# Altium PCB board.PcbDoc
Units mil, origin at the board's own origin, x right, y up, seen from the top; angles counter-clockwise.
Board outline 6000 x 4000 mil, 2 copper layers (Top Layer, Bottom Layer); 87 components, 53 nets, 353 pads, 0 vias.
Unrouted connection lines stored in the file: 208.
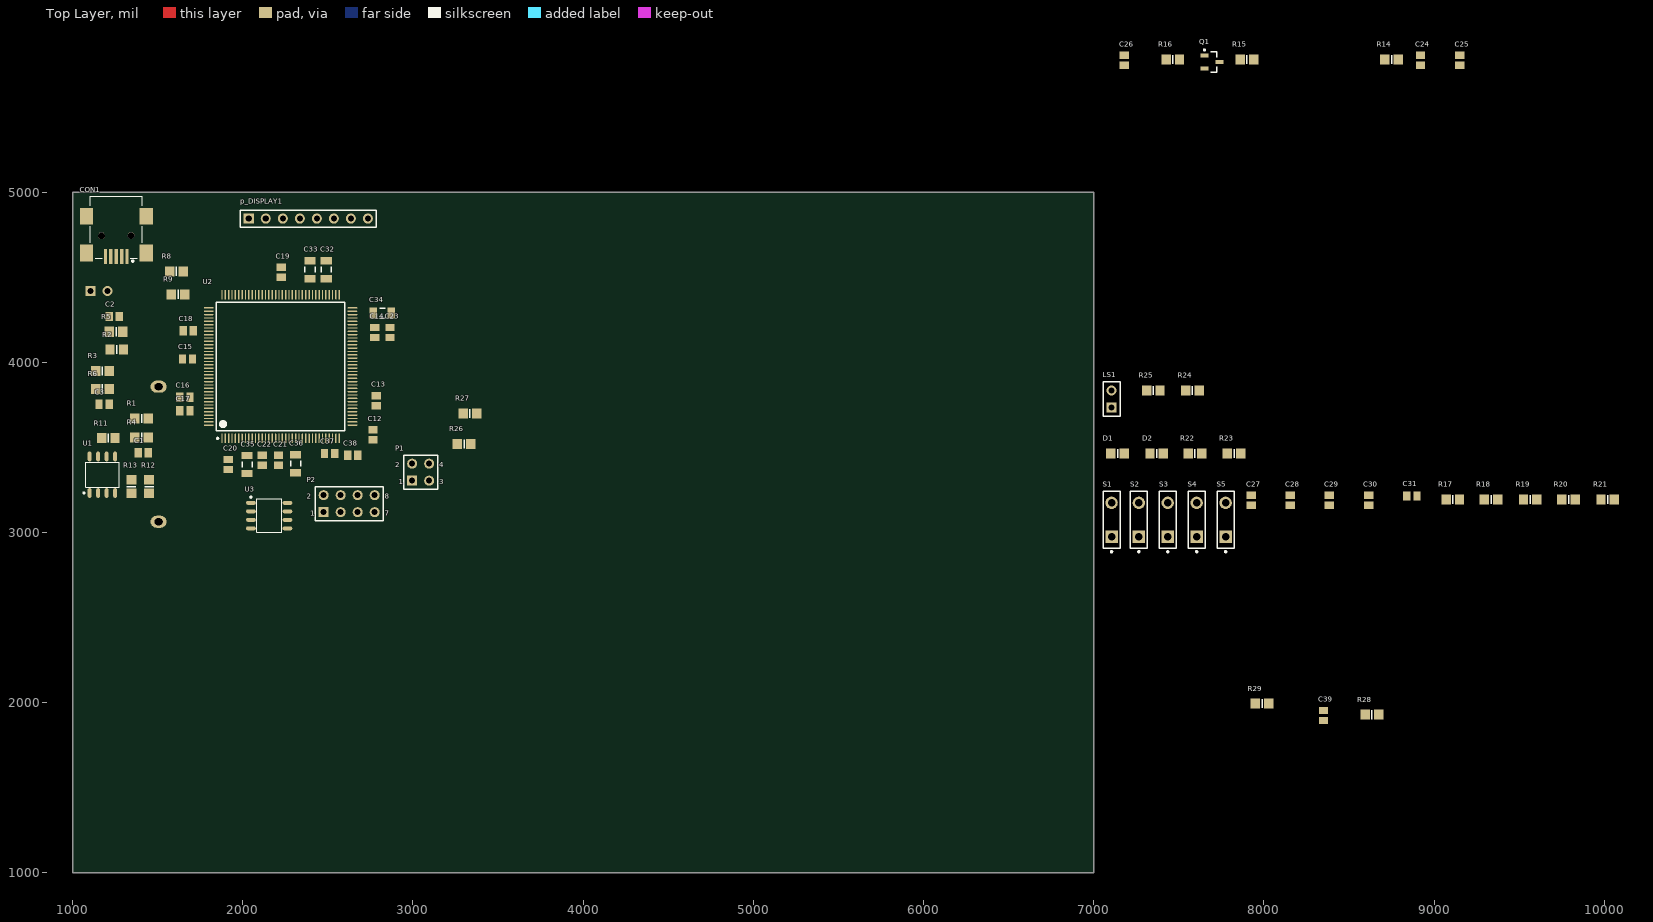
[diagram p0: Top Layer view]
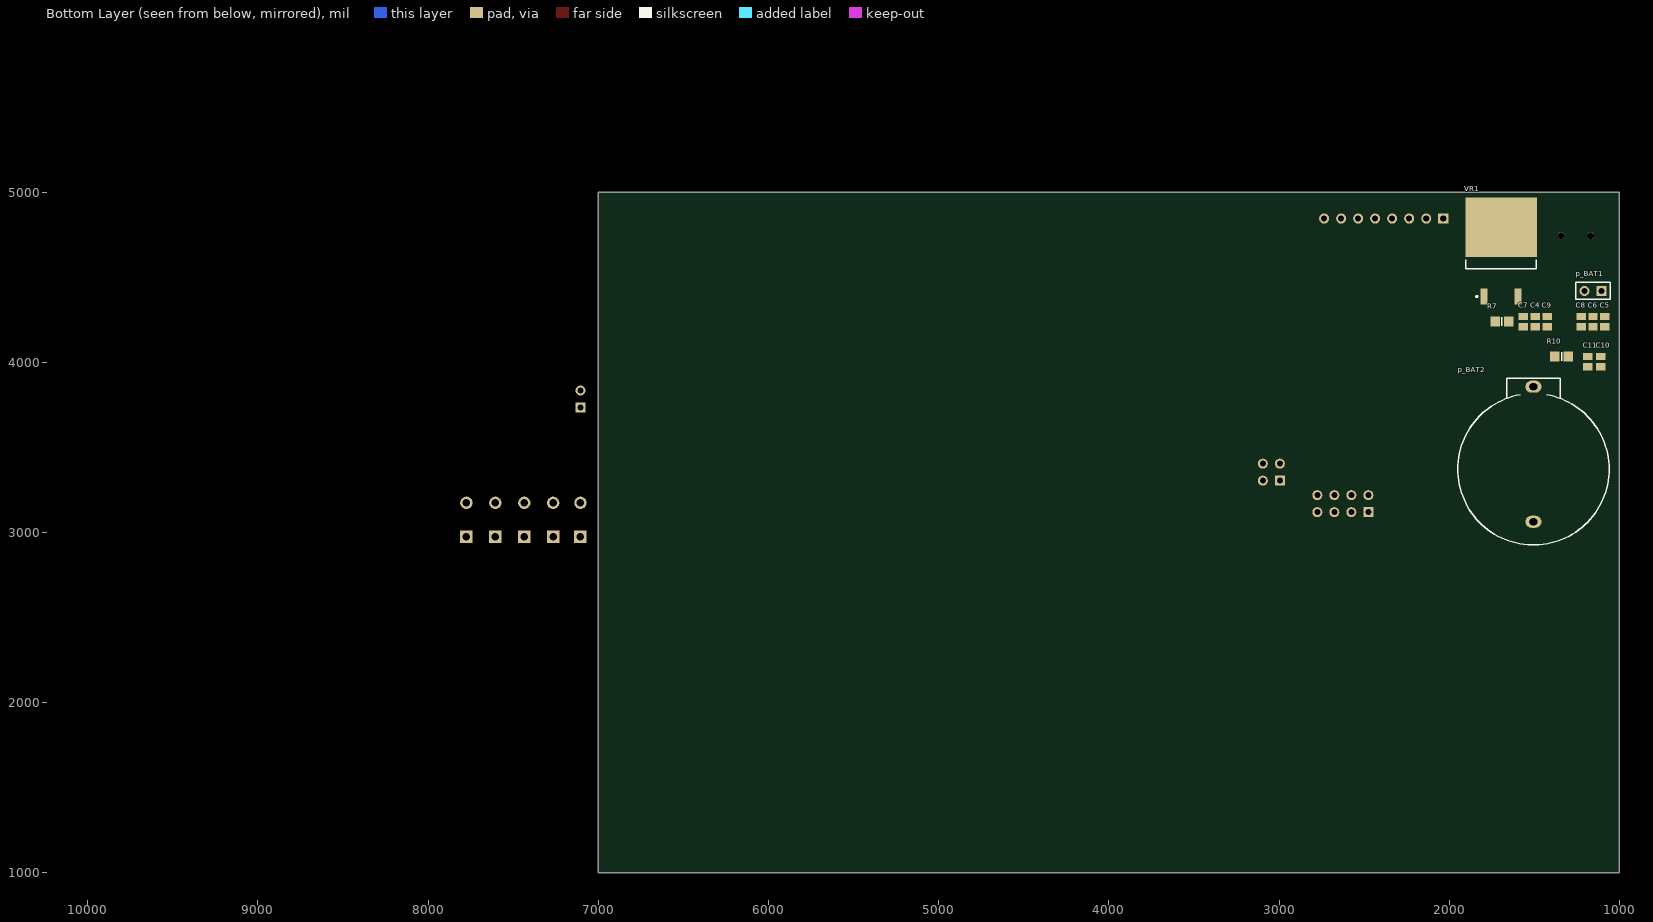
[diagram p1: Bottom Layer view, seen from below]

## Layer stack, top to bottom
Top Solder: solder mask 0.4, Solder Resist, Dk 3.5
Top Layer: signal copper 1.4
Dielectric 1: dielectric 12.6, FR-4, Dk 4.8
Bottom Layer: signal copper 1.4
Bottom Solder: solder mask 0.4, Solder Resist, Dk 3.5

## Board outline
1000,1000 7000,1000 7000,5000 1000,5000

## Design rules (kind name [scope] priority, off if disabled: settings)
Clearance [All] p1: gap=10 ignorepadtopadclearanceinfootprint=FALSE except(0: Arc-Hole Track-Hole SMDPad-Hole THPad-Hole Via-Hole Fill-Hole Poly-Hole Region-Hole Text-Hole)
PolygonConnect [All] p1: connectstyle=Relief reliefconductorwidth=10 reliefentries=4 polygonreliefangle="90 Angle" airgapwidth=10
RoomDefinition p06_sound [InComponentClass('p06_sound')] p1: confinementstyle=ConfineIn formatcopy=TRUE lockcomponents=FALSE outline 7045,3675 7680,3675 7680,3995 7045,3995
RoomDefinition p05_leds [InComponentClass('p05_leds')] p2: confinementstyle=ConfineIn formatcopy=TRUE lockcomponents=FALSE outline 7045,3405 7925,3405 7925,3625 7045,3625
RoomDefinition p04_buttons [InComponentClass('p04_buttons')] p3: confinementstyle=ConfineIn formatcopy=TRUE lockcomponents=FALSE outline 7045,2870 10115,2870 10115,3355 7045,3355
RoomDefinition p03_display [InComponentClass('p03_display')] p4: confinementstyle=ConfineIn formatcopy=TRUE lockcomponents=FALSE outline 7140,5000 9305,5000 9305,5940 7140,5940
RoutingVias [All] p1: holewidth=28 width=50 viastyle="Through Hole" minholewidth=28 minwidth=50 maxholewidth=28 maxwidth=50
SolderMaskExpansion [All] p1: expansion=4
Width [All] p1: maxlimit=10 minlimit=10 preferedwidth=10
30 further rules are at their usual default settings.

## Classes and differential pairs
component class p09_memory: U3
component class p02_power: C1 C2 C3 C4 C5 C6 C7 C8 C9 C10 C11 C12 C13 C14 C15 C16 C17 C18 C19 C20 C21 C22 C23 C39 CON1 p_BAT1 p_BAT2 R1 R2 R3 R4 R5 R6 R7 R8 R9 R10 R11 R12 R13 R28 R29 U1 VR1
component class p04_buttons: C27 C28 C29 C30 C31 R17 R18 R19 R20 R21 S1 S2 S3 S4 S5
component class p05_leds: D1 D2 R22 R23
component class p06_sound: LS1 R24 R25
component class p07_cpu_renesas_144: C32 C33 C34 C35 C36 C37 C38 U2
component class p08_boot: P1 P2 R26 R27
component class p03_display: C24 C25 C26 p_DISPLAY1 Q1 R14 R15 R16

## Components (designator, comment, footprint, x,y, rotation, side; value= is the part's Value field where it differs from the comment)
C1 "Cap" C0805 1415,3470 r180 top value=0.1nF
C2 "Cap" C0805 1245,4270 r180 top value=0.1nF
C3 "Cap" C0805 1185,3755 r180 top value=0.1nF
C4 "Cap" C0805 1495,4240 r90 bottom value=100nF
C5 "Cap" C0805 1085,4240 r90 bottom value=100nF
C6 "Cap" C0805 1155,4240 r90 bottom value=100nF
C7 "Cap" C0805 1565,4240 r90 bottom value=100nF
C8 "Cap" C0805 1225,4240 r90 bottom value=100nF
C9 "Cap" C0805 1425,4240 r90 bottom value=100nF
C10 "Cap" C0805 1110,4005 r90 bottom value=1nF
C11 "Cap" C0805 1185,4005 r90 bottom value=100nF
C12 "Cap" C0805 2765,3575.47 r90 top value=100nF
C13 "Cap" C0805 2785,3775.47 r90 top value=100nF
C14 "Cap" C0805 2775,4175.47 r90 top value=100nF
C15 "Cap" C0805 1675,4020 r0 top value=100nF
C16 "Cap" C0805 1660,3795 r0 top value=100nF
C17 "Cap" C0805 1660,3715 r0 top value=100nF
C18 "Cap" C0805 1679.53,4185 r0 top value=100nF
C19 "Cap" C0805 2225,4530 r270 top value=100nF
C20 "Cap" C0805 1915,3400 r90 top value=100nF
C21 "Cap" C0805 2210,3425 r90 top value=100nF
C22 "Cap" C0805 2115,3425.47 r90 top value=100nF
C23 "Cap" C0805 2865,4175.47 r90 top value=100nF
C24 "Cap" C0805 8920,5775 r90 top value=1nF
C25 "Cap" C0805 9150,5775 r90 top value=10nF
C26 "Cap" C0805 7180,5775 r90 top value=1nF
C27 "Cap" C0805 7925,3190 r90 top value=0.1nF
C28 "Cap" C0805 8155,3190 r90 top value=0.1nF
C29 "Cap" C0805 8385,3190 r90 top value=0.1nF
C30 "Cap" C0805 8615,3190 r90 top value=0.1nF
C31 "Cap" C0805 8870,3215 r0 top value=0.1nF
C32 "Cap" C1206 2490,4545 r90 top value=10uF
C33 "Cap" C1206 2395,4545 r90 top value=4.7uF
C34 "Cap" C1206 2820,4290 r180 top value=10uF
C35 "Cap" C1206 2025,3400 r270 top value=4.7uF
C36 "Cap" C1206 2310,3405 r270 top value=4.7uF
C37 "Cap" C0805 2510,3465 r180 top value=1uF
C38 "Cap" C0805 2645.47,3455 r180 top value=1uF
C39 "Cap" C0805 8350,1925 r90 top value=0.1nF
CON1 "897-43-005-00-100001" USB-MINI-B-5P-SMD 1256.61,4622.95 r180 top
D1 "LED0" 6-0805_M 7140,3465 r0 top
D2 "LED0" 6-0805_M 7370,3465 r0 top
LS1 "Buzzer" HDR1X2 7105,3735 r90 top
P1 "Header 2X2" HDR2X2 2995,3305 r0 top
P2 "Header 4X2" HDR2X4 2475,3120 r0 top
p_BAT1 "Header 2" HDR1X2 1105,4420 r0 bottom
p_BAT2 "" BTH2032 1505,3370 r270 bottom
p_DISPLAY1 "Nokia 5110 Display" HDR1X8 2035,4845 r0 top
Q1 "PNP" SOT-23B_N 7695,5765 r0 top
R1 "Res1" 6-0805_M 1405,3670 r180 top value=120k
R2 "Res1" 6-0805_M 1259.37,4075 r0 top value=120k
R3 "Res1" 6-0805_M 1175.63,3950 r180 top value=120k
R4 "Res1" 6-0805_M 1405,3560 r180 top value=33k
R5 "Res1" 6-0805_M 1255,4180 r180 top value=33k
R6 "Res1" 6-0805_M 1175,3845 r180 top value=33k
R7 "0R" 6-0805_M 1690,4240 r0 bottom value=0.2R
R8 "0R" 6-0805_M 1610,4535 r0 top value=0.2R
R9 "0R" 6-0805_M 1619.37,4400 r0 top value=0.2R
R10 "Res1" 6-0805_M 1340,4035 r0 bottom value=0.2R
R11 "Res1" 6-0805_M 1210,3555 r180 top value=120k
R12 "Res1" 6-0805_M 1450,3270 r270 top value=120k
R13 "Res1" 6-0805_M 1345,3270 r90 top value=120k
R14 "Res1" 6-0805_M 8750,5780 r0 top value=100k
R15 "Res1" 6-0805_M 7900,5780 r0 top value=10k
R16 "Res1" 6-0805_M 7465,5780 r0 top value=300R
R17 "Res1" 6-0805_M 9110,3195 r0 top value=100k
R18 "Res1" 6-0805_M 9335,3195 r0 top value=100k
R19 "Res1" 6-0805_M 9565,3195 r0 top value=100k
R20 "Res1" 6-0805_M 9790,3195 r0 top value=100k
R21 "Res1" 6-0805_M 10020,3195 r0 top value=100k
R22 "Res1" 6-0805_M 7595,3465 r0 top value=10k
R23 "Res1" 6-0805_M 7825,3465 r0 top value=10k
R24 "Res1" 6-0805_M 7580,3835 r0 top value=0R
R25 "Res1" 6-0805_M 7350,3835 r0 top value=10R
R26 "Res1" 6-0805_M 3300,3520 r0 top value=120k
R27 "Res1" 6-0805_M 3335,3700 r0 top value=120k
R28 "0R" 6-0805_M 8635,1930 r0 top value=0.2R
R29 "0R" 6-0805_M 7989.37,1995 r0 top value=0.2R
S1 "SW-PB" SPST-2 7105,3075 r90 top
S2 "SW-PB" SPST-2 7265,3075 r90 top
S3 "SW-PB" SPST-2 7435,3075 r90 top
S4 "SW-PB" SPST-2 7605,3075 r90 top
S5 "SW-PB" SPST-2 7775,3075 r90 top
U1 "TPS2116" SOIC127P600X175-8N 1175,3340 r90 top
U2 "R7F0E015D2CFB#AA1" SQFP50P2200X2200X170-144N 2222.24,3975.79 r90 top
U3 "W25Q80DV/DL" SOIC127P600X175-8N 2155,3100 r0 top
VR1 "Volt Reg" D2PAK_N 1695,4655.24 r90 bottom

## Footprints (in the part's own frame and the unit in brackets; to place one, negate y for a bottom-side part, rotate by r counter-clockwise, add the part's x,y. Pads: shape width x height; smd on the part's side, far side on the other; paste and mask are expansions set on the pad)
6-0805_M [mm] "Chip Resistor, Body 2.0x1.2mm, IPC Low Density"
  rect 1.4x1.5 smd: 1(-1,0) 2(1,0)
  silkscreen extent 0,-0.65 0,0.65, body extent -1.07,-0.7 1.07,0.7, height 0.7
BTH2032 [mm] "CR2032 BATTERY HOLDER"
  oval 1.8x2.4 hole 1 slot 1.2 at 90 deg: 1(-12.38,0) 2(7.78,0)
  silkscreen extent -13.6,-11.3 11.25,11.3, body extent -13.45,-11 11.05,11, height 8.5
C0805 [mm] "Chip Capacitor, Body 2.0x1.3mm, IPC High Density"
  rect 1.1x1.4 smd: 1(-0.75,0) 2(0.75,0)
  body extent -1.1,-0.72 1.1,0.72, height 1.4
C1206 [mm] "Chip Capacitor, Body 3.2x1.6mm, IPC High Density"
  rect 1.1x1.7 smd: 1(-1.35,0) 2(1.35,0)
  silkscreen extent -0.4,-0.75 0.4,0.75, body extent -1.7,-0.9 1.7,0.9, height 1.3
D2PAK_N [mm] "D2-PAK, 4-Leads, Body 8.8x10.4mm, Pitch 2.54mm, Lead Span 15.1mm, IPC Medium Density"
  rect 2.4x1.05 smd: 1(-6.8,2.54) 3(-6.8,-2.54)
  rect 8.9x10.65 smd: 2(3.55,0)
  silkscreen extent -6.92,-5.25 -1.3,5.25, body extent -2.7,-5.28 6.3,5.28, height 4.69
HDR1X2 [mm] "Connector; Header; 2 Position"
  rect 1.5x1.5 hole 0.9: 1(0,0)
  round 1.5 hole 0.9: 2(2.54,0)
  silkscreen extent -1.27,-1.27 3.81,1.27
HDR1X8 [mm] "Connector; Header; 8 Position"
  rect 1.5x1.5 hole 0.9: 1(0,0)
  round 1.5 hole 0.9: 2(2.54,0) 3(5.08,0) 4(7.62,0) 5(10.16,0) 6(12.7,0) 7(15.24,0) 8(17.78,0)
  silkscreen extent -1.27,-1.27 19.05,1.27
HDR2X2 [mm] "Connector; Header; 2x2 Position"
  rect 1.5x1.5 hole 0.9: 1(0,0)
  round 1.5 hole 0.9: 2(0,2.54) 3(2.54,0) 4(2.54,2.54)
  silkscreen extent -1.27,-1.27 3.81,3.81
HDR2X4 [mm] "Connector; Header; 4x2 Position"
  rect 1.5x1.5 hole 0.9: 1(0,0)
  round 1.5 hole 0.9: 2(0,2.54) 3(2.54,0) 4(2.54,2.54) 5(5.08,0) 6(5.08,2.54) 7(7.62,0) 8(7.62,2.54)
  silkscreen extent -1.27,-1.27 8.89,3.81
SOIC127P600X175-8N [mm] "SOIC, 8-Leads, Body 4.90x3.90mm, Pitch 1.27mm, IPC Medium Density"
  oval 1.45x0.6 smd mask+0.1: 1(-2.725,1.905) 2(-2.725,0.635) 3(-2.725,-0.635) 4(-2.725,-1.905) 5(2.725,-1.905) 6(2.725,-0.635) 7(2.725,0.635) 8(2.725,1.905)
  silkscreen extent -2.85,-2.5 1.85,2.88, body extent -3,-2.5 3,2.5, height 1.75
SOT-23B_N [mm] "SOT23, 3-Leads, Body 2.9x1.3mm, Pitch 0.95mm, Lead Span 2.4mm, IPC Medium Density"
  rect 1.15x0.6 smd: 1(-1.125,0.95) 2(-1.125,-0.95) 3(1.125,0)
  silkscreen extent -1.25,-1.5 0.7,1.92, body extent -0.7,-1.5 0.7,1.5, height 1.14
SPST-2 [mm] "Switch; 2 Leads"
  rect 1.85x1.85 hole 1.1: 1(-2.54,0)
  round 1.85 hole 1.1: 2(2.54,0)
  silkscreen extent -4.89,-1.27 4.28,1.27
SQFP50P2200X2200X170-144N [mm] "SQFP, 144-Leads, Body 20.00x20.00mm, Pitch 0.50mm, IPC Medium Density"
  oval 1.45x0.2 smd: 1(-10.725,8.75) 2(-10.725,8.25) 3(-10.725,7.75) 4(-10.725,7.25) 5(-10.725,6.75) 6(-10.725,6.25) 7(-10.725,5.75) 8(-10.725,5.25) 9(-10.725,4.75) 10(-10.725,4.25) 11(-10.725,3.75) 12(-10.725,3.25) 13(-10.725,2.75) 14(-10.725,2.25) 15(-10.725,1.75) 16(-10.725,1.25) 17(-10.725,0.75) 18(-10.725,0.25) 19(-10.725,-0.25) 20(-10.725,-0.75) 21(-10.725,-1.25) 22(-10.725,-1.75) 23(-10.725,-2.25) 24(-10.725,-2.75) 25(-10.725,-3.25) 26(-10.725,-3.75) 27(-10.725,-4.25) 28(-10.725,-4.75) 29(-10.725,-5.25) 30(-10.725,-5.75) 31(-10.725,-6.25) 32(-10.725,-6.75) 33(-10.725,-7.25) 34(-10.725,-7.75) 35(-10.725,-8.25) 36(-10.725,-8.75) 73(10.725,-8.75) 74(10.725,-8.25) 75(10.725,-7.75) 76(10.725,-7.25) 77(10.725,-6.75) 78(10.725,-6.25) 79(10.725,-5.75) 80(10.725,-5.25) 81(10.725,-4.75) 82(10.725,-4.25) 83(10.725,-3.75) 84(10.725,-3.25) 85(10.725,-2.75) 86(10.725,-2.25) 87(10.725,-1.75) 88(10.725,-1.25) 89(10.725,-0.75) 90(10.725,-0.25) 91(10.725,0.25) 92(10.725,0.75) 93(10.725,1.25) 94(10.725,1.75) 95(10.725,2.25) 96(10.725,2.75) 97(10.725,3.25) 98(10.725,3.75) 99(10.725,4.25) 100(10.725,4.75) 101(10.725,5.25) 102(10.725,5.75) 103(10.725,6.25) 104(10.725,6.75) 105(10.725,7.25) 106(10.725,7.75) 107(10.725,8.25) 108(10.725,8.75)
  oval 0.2x1.45 smd: 37(-8.75,-10.725) 38(-8.25,-10.725) 39(-7.75,-10.725) 40(-7.25,-10.725) 41(-6.75,-10.725) 42(-6.25,-10.725) 43(-5.75,-10.725) 44(-5.25,-10.725) 45(-4.75,-10.725) 46(-4.25,-10.725) 47(-3.75,-10.725) 48(-3.25,-10.725) 49(-2.75,-10.725) 50(-2.25,-10.725) 51(-1.75,-10.725) 52(-1.25,-10.725) 53(-0.75,-10.725) 54(-0.25,-10.725) 55(0.25,-10.725) 56(0.75,-10.725) 57(1.25,-10.725) 58(1.75,-10.725) 59(2.25,-10.725) 60(2.75,-10.725) 61(3.25,-10.725) 62(3.75,-10.725) 63(4.25,-10.725) 64(4.75,-10.725) 65(5.25,-10.725) 66(5.75,-10.725) 67(6.25,-10.725) 68(6.75,-10.725) 69(7.25,-10.725) 70(7.75,-10.725) 71(8.25,-10.725) 72(8.75,-10.725) 109(8.75,10.725) 110(8.25,10.725) 111(7.75,10.725) 112(7.25,10.725) 113(6.75,10.725) 114(6.25,10.725) 115(5.75,10.725) 116(5.25,10.725) 117(4.75,10.725) 118(4.25,10.725) 119(3.75,10.725) 120(3.25,10.725) 121(2.75,10.725) 122(2.25,10.725) 123(1.75,10.725) 124(1.25,10.725) 125(0.75,10.725) 126(0.25,10.725) 127(-0.25,10.725) 128(-0.75,10.725) 129(-1.25,10.725) 130(-1.75,10.725) 131(-2.25,10.725) 132(-2.75,10.725) 133(-3.25,10.725) 134(-3.75,10.725) 135(-4.25,10.725) 136(-4.75,10.725) 137(-5.25,10.725) 138(-5.75,10.725) 139(-6.25,10.725) 140(-6.75,10.725) 141(-7.25,10.725) 142(-7.75,10.725) 143(-8.25,10.725) 144(-8.75,10.725)
  silkscreen extent -10.85,-9.6 9.6,9.6, body extent -10,-10 10,10, height 1.7
USB-MINI-B-5P-SMD [mm]
  rect 0.5x2.2 smd mask+0.1: 1(-1.6,0) 2(-0.8,0) 3(0,0) 4(0.8,0) 5(1.6,0)
  rect 2x2.5 smd mask+0.1: 6(-4.45,-0.5) 7(4.45,-0.5) 8(-4.45,-6) 9(4.45,-6)
  round 1 hole 1 unplated mask+0.1: 10(-2.2,-3.1) 11(2.2,-3.1)
  silkscreen extent -3.85,-8.95 3.85,0.81, body extent -4.93,-9.01 4.97,-0.01, height 3.9

## Part data
C1 C2 C3 C4 C5 C6 C7 C8 C9 C10 C11 C12 C13 C14 C15 C16 C17 C18 C19 C20 C21 C22 C23 C24 C25 C26 C27 C28 C29 C30 C31 C32 C33 C34 C35 C36 C37 C38 C39: "Capacitor", LatestRevisionDate=17-Jul-2002, LatestRevisionNote="Re-released for DXP Platform.", PackageDescription="Radial Cap, Thru-Hole; 2 Leads; 0.3 in Pin Spacing", PackageReference=RAD-0.3, Published=8-Jun-2000, Publisher="Altium Limited"
CON1: library part MINI-USB-32005-201, "Connector,MiniUSB B port,5 position,Right Angle,Gold flash 30u,black,SMD", Manufacturer=MILL-MAX, Embest PN=1009007100067, Manufacturer Part Number=897-43-005-00-100001, Part Type="USB Connector"
D1 D2: "Typical INFRARED GaAs LED", LatestRevisionDate=08-Jul-2005, LatestRevisionNote="Mech Layer 1 removed.", PackageDescription="LED; 2 Leads", PackageReference=LED-0, Published=8-Jun-2000, Publisher="Altium Limited"
LS1: "Magnetic Transducer Buzzer", ComponentLink1Description="Manufacturer Link", ComponentLink1URL=http://www.megastar.com/linecard/buzzmode/index.php, DatasheetVersion=17-Dec-2003, LatestRevisionDate=17-Dec-2003, LatestRevisionNote="Schematic revised, PCB Footprint replaced.", PackageDescription="Magnetic Transducer Buzzer", PackageReference=ABSM-1574, Published=24-Mar-1999, Publisher="Altium Limited"
P1: "Header, 2-Pin, Dual row", LatestRevisionDate=17-Jul-2002, LatestRevisionNote="Re-released for DXP Platform.", Publisher="Altium Limited"
P2: "Header, 4-Pin, Dual row", LatestRevisionDate=17-Jul-2002, LatestRevisionNote="Re-released for DXP Platform.", Publisher="Altium Limited"
p_BAT1: "Header, 2-Pin", LatestRevisionDate=17-Jul-2002, LatestRevisionNote="Re-released for DXP Platform.", Publisher="Altium Limited"
p_BAT2: library part BATH_CR2032, "BATTERY HOLDER, CR2032", .=http://www.chila.ir, MANF_P#=-
p_DISPLAY1: library part "Header 8", "Header, 8-Pin", LatestRevisionDate=17-Jul-2002, LatestRevisionNote="Re-released for DXP Platform.", Publisher="Altium Limited"
Q1: "PNP Bipolar Transistor", LatestRevisionDate=29-May-2009, LatestRevisionNote="IPC-7351 Footprint Added.", PackageDescription="3-Pin SOT-23 Package 0.95 mm Pitch, 2.4 mm Lead Span", PackageReference=SOT-23B, PackageVersion=Aug-1999, Published=8-Jun-2000, Publisher="Altium Limited"
R1 R2 R3 R4 R5 R6 R10 R11 R12 R13 R14 R15 R16 R17 R18 R19 R20 R21 R22 R23 R24 R25 R26 R27: "Resistor", LatestRevisionDate=17-Jul-2002, LatestRevisionNote="Re-released for DXP Platform.", PackageDescription="Axial Device, Thru-Hole; 2 Leads; 0.3 in Pin Spacing", PackageReference=AXIAL-0.3, Published=8-Jun-2000, Publisher="Altium Limited"
R7 R8 R9 R28 R29: library part Res1, "Resistor", LatestRevisionDate=17-Jul-2002, LatestRevisionNote="Re-released for DXP Platform.", PackageDescription="Axial Device, Thru-Hole; 2 Leads; 0.3 in Pin Spacing", PackageReference=AXIAL-0.3, Published=8-Jun-2000, Publisher="Altium Limited"
S1 S2 S3 S4 S5: "Switch", LatestRevisionDate=17-Jul-2002, LatestRevisionNote="Re-released for DXP Platform.", PackageDescription="Switch; 2 Leads", PackageReference=SPST-2, Published=24-Mar-1999, Publisher="Altium Limited"
U1: "TPS2116 1.6 V to 5.5 V, 2.5-A Low IQ Power Mux with Manual and Priority Switchover"
U2: "ARM® Cortex®-M0+ series Microcontroller IC 32-Bit 24MHz 1.5MB (1.5M x 8) FLASH 144-LFQFP (20x20)"
U3: "2.5V AND 3V 8M-BIT  SERIAL FLASH MEMORY WITH  DUAL AND QUAD SPI"
VR1: "Voltage Regulator", LatestRevisionDate=29-May-2009, LatestRevisionNote="IPC-7351 Footprint Added.", PackageDescription="3-Pin Transistor Outline Package 2.54 mm Pitch, 15.1 mm Lead Span", PackageReference=D2PAK, Published=24-Mar-1999, Publisher="Altium Limited"

## Nets (pads, with @x,y where several pads share a name; then routed paths per layer and width w, separated by ;. In a path a pad name is that pad's centre, name@x,y a point inside that pad or via, vN(x,y) a via of type N, cw(c..) or ccw(c..) an arc to the next point about the centre after c; other vN are vias at no path point)
A: C28.1 R18.2 S2.2 U2.106
B: C29.1 R19.2 S3.2 U2.105
BL_POWER: p_DISPLAY1.7 R16.1
C: C30.1 R20.2 S4.2 U2.104
D: C31.1 R21.2 S5.2 U2.69
D+: R9.1 U2.44
D-: R8.1 U2.43
DA0: R25.1 U2.127
ENTER: C27.1 R17.2 S1.2 U2.108
GND: C1.2 C2.2 C3.2 C4.1 C5.1 C6.1 C7.1 C8.1 C9.1 C10.1 C11.1 C12.1 C13.1 C14.1 C15.1 C16.1 C17.1 C18.1 C19.1 C20.1 C21.1 C22.1 C23.1 C24.1 C25.1 C26.1 C27.2 C28.2 C29.2 C30.2 C31.2 C32.2 C33.2 C34.1 C35.2 C36.2 C37.1 C38.1 C39.2 CON1.5 D1.2 D2.2 LS1.2 P2.1 P2.3 P2.5 P2.7 p_BAT1.1 p_BAT2.2 p_DISPLAY1.8 R4.2 R5.2 R6.2 R13.2 R26.2 R27.2 R29.2 S1.1 S2.1 S3.1 S4.1 S5.1 U1.1 U2.2 U2.17 U2.37 U2.40 U2.41 U2.42 U2.67 U2.91 U2.100 U2.117 U2.128 U2.134 U2.139 U3.4 VR1.2
LCD_BL: R15.2 U2.29
LCD_CE: p_DISPLAY1.2 U2.77
LCD_CLK: p_DISPLAY1.5 U2.76
LCD_DC: p_DISPLAY1.3 U2.79
LCD_DIN: p_DISPLAY1.4 U2.74
LCD_RST: p_DISPLAY1.1 U2.78
LED0: R22.1 U2.24
LED1: R23.1 U2.55
MD: P1.4 R27.1 U2.35
MSPI_CLK: U2.12 U3.6
MSPI_CS: U2.13 U3.1
MSPI_IO0: U2.8 U3.5
MSPI_IO1: U2.9 U3.2
MSPI_IO2: U2.10 U3.3
MSPI_IO3: U2.11 U3.7
MSPI_VCC: U3.8
NetC26_2: C26.2 Q1.1 R16.2
NetC35_1: C35.1 U2.14
NetC36_1: C36.1 U2.21
NetC37_2: C37.2 U2.31
NetC38_2: C38.2 U2.32
NetCON1_1: CON1.1 R7.2
NetCON1_2: CON1.2 R8.2
NetCON1_3: CON1.3 R9.2
NetD1_1: D1.1 R22.2
NetD2_1: D2.1 R23.2
NetLS1_1: LS1.1 R24.2 R25.2
NetQ1_2: Q1.2 R14.2 R15.1
NetR12_2: R12.2 R13.1 U1.4
PWM6: R24.1 U2.80
RES#: P1.2 P2.6 R26.1 U2.34
ST: R11.2 U1.8 U2.114
SWCLK: P2.2 U2.22
SWDIO: P2.4 U2.33
VBAT: p_BAT1.2 p_BAT2.1 R1.2 R10.2
VBAT_36: C10.2 C11.2 R10.1 R11.1 R12.1 U1.3 U1.5
VBAT_LP0: C1.1 R1.1 R4.1 U2.136
VCC: C12.2 C13.2 C14.2 C15.2 C16.2 C17.2 C18.2 C19.2 C20.2 C21.2 C22.2 C23.2 C24.2 C25.2 C32.1 C33.1 C34.2 P1.1 P1.3 P2.8 p_DISPLAY1.6 Q1.3 R2.2 R14.1 R17.1 R18.1 R19.1 R20.1 R21.1 U1.2 U1.7 U2.3 U2.20 U2.38 U2.45 U2.66 U2.90 U2.116 U2.124 U2.137 U2.138
VCC_LP0: C2.1 R2.1 R5.1 U2.135
VUSB: C4.2 C7.2 C9.2 R3.2 R7.1 R28.1 VR1.1
VUSB_33: C5.2 C6.2 C8.2 U1.6 VR1.3
VUSB_LP0: C3.1 R3.1 R6.1 U2.133
VUSB_SEN: C39.1 R28.2 R29.1 U2.47
pads on no net: CON1.4 CON1.6 CON1.7 CON1.8 CON1.9 CON1.10 CON1.11 U2.1 U2.4 U2.5 U2.6 U2.7 U2.15 U2.16 U2.18 U2.19 U2.23 U2.25 U2.26 U2.27 U2.28 U2.30 U2.36 U2.39 U2.46 U2.48 U2.49 U2.50 U2.51 U2.52 U2.53 U2.54 U2.56 U2.57 U2.58 U2.59 U2.60 U2.61 U2.62 U2.63 U2.64 U2.65 U2.68 U2.70 U2.71 U2.72 U2.73 U2.75 U2.81 U2.82 U2.83 U2.84 U2.85 U2.86 U2.87 U2.88 U2.89 U2.92 U2.93 U2.94 U2.95 U2.96 U2.97 U2.98 U2.99 U2.101 U2.102 U2.103 U2.107 U2.109 U2.110 U2.111 U2.112 U2.113 U2.115 U2.118 U2.119 U2.120 U2.121 U2.122 U2.123 U2.125 U2.126 U2.129 U2.130 U2.131 U2.132 U2.140 U2.141 U2.142 U2.143 U2.144

## Text inside footprints (layer, text, board x,y; h text height)
P1: Top Overlay "3" at 3155,3285 h30; Top Overlay "4" at 3155,3385 h30; Top Overlay "2" at 2895,3385 h30; Top Overlay "1" at 2915,3285 h30
P2: Top Overlay "8" at 2835,3200 h30; Top Overlay "7" at 2835,3100 h30; Top Overlay "1" at 2395,3100 h30; Top Overlay "2" at 2375,3200 h30